# Altium PCB vga.PcbDoc
Units mm, origin at the board's own origin, x right, y up, seen from the top; angles counter-clockwise.
Board outline 35.87 x 32.67 mm, 2 copper layers (Top Layer, Bottom Layer); 2 components, 17 nets, 37 pads, 2 vias.
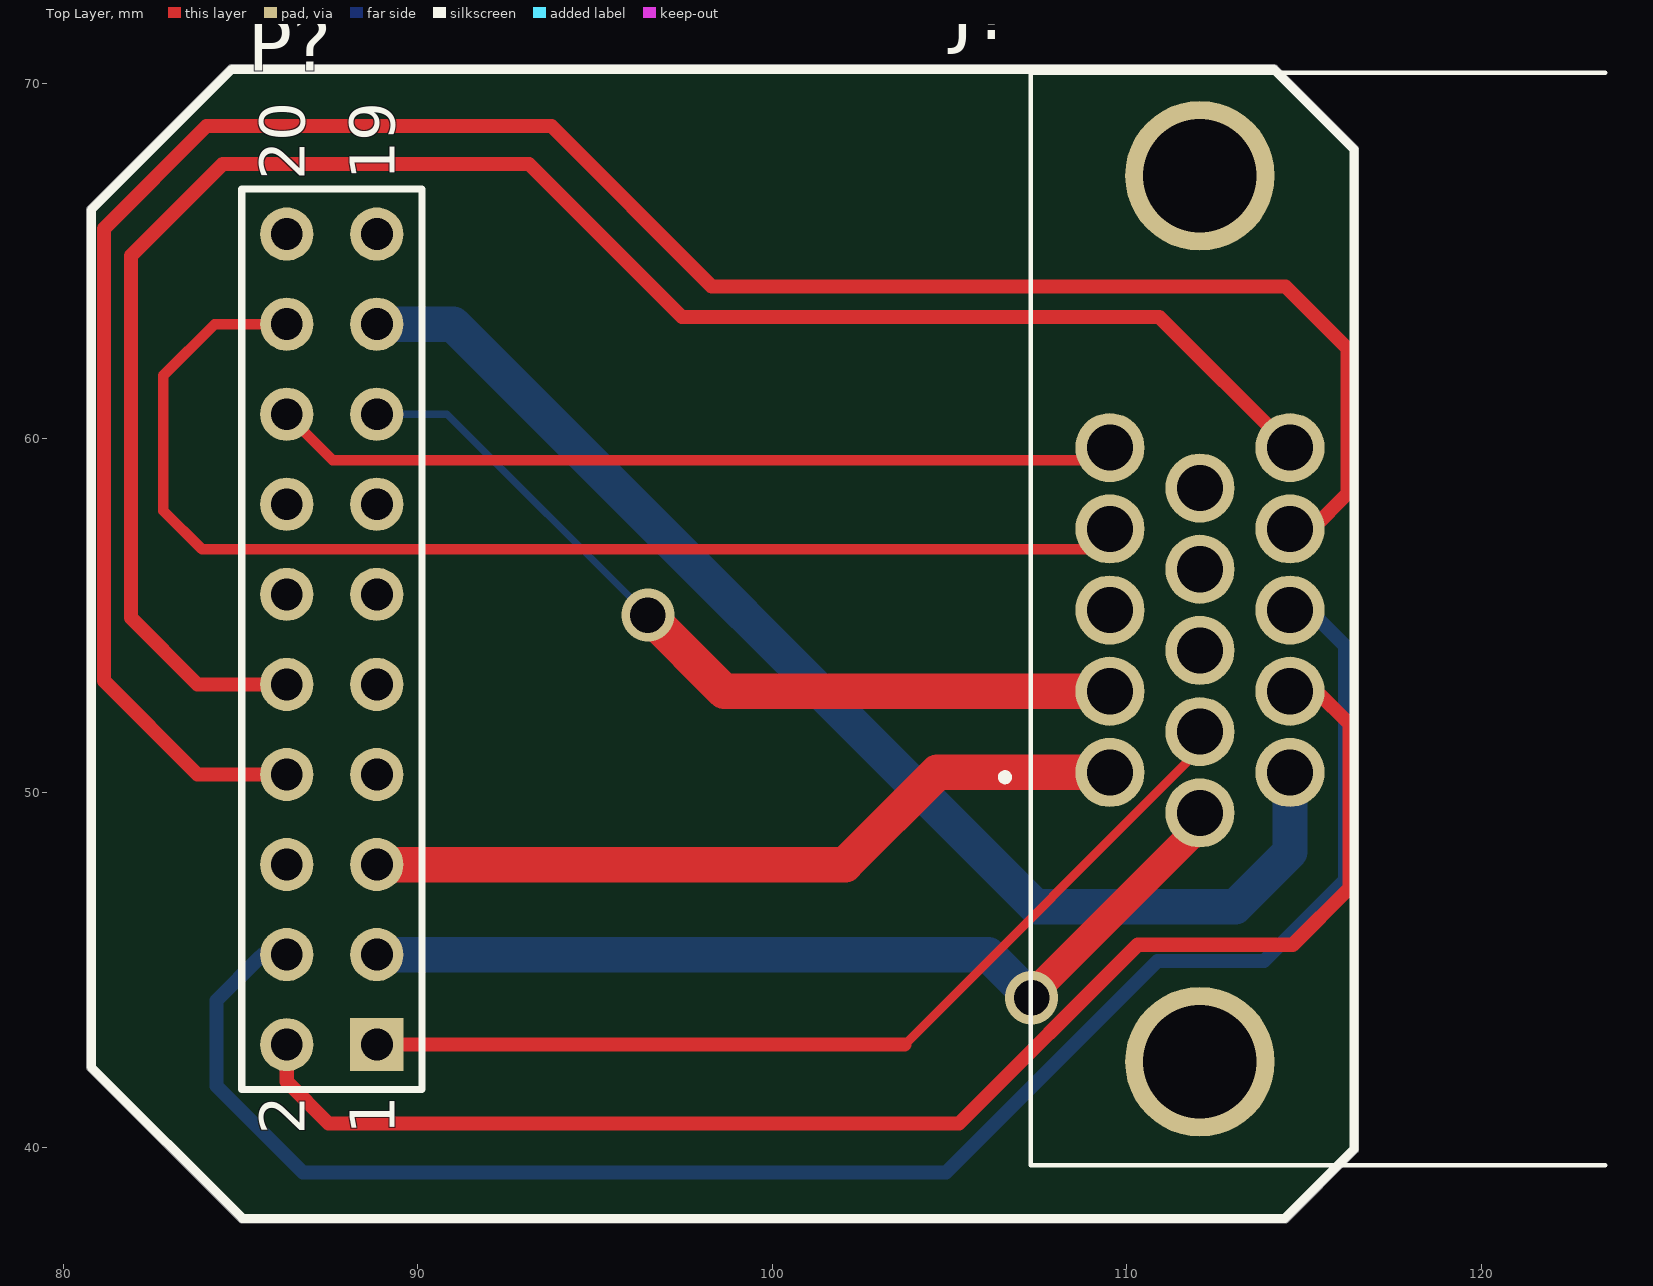
[diagram p0: Top Layer view]
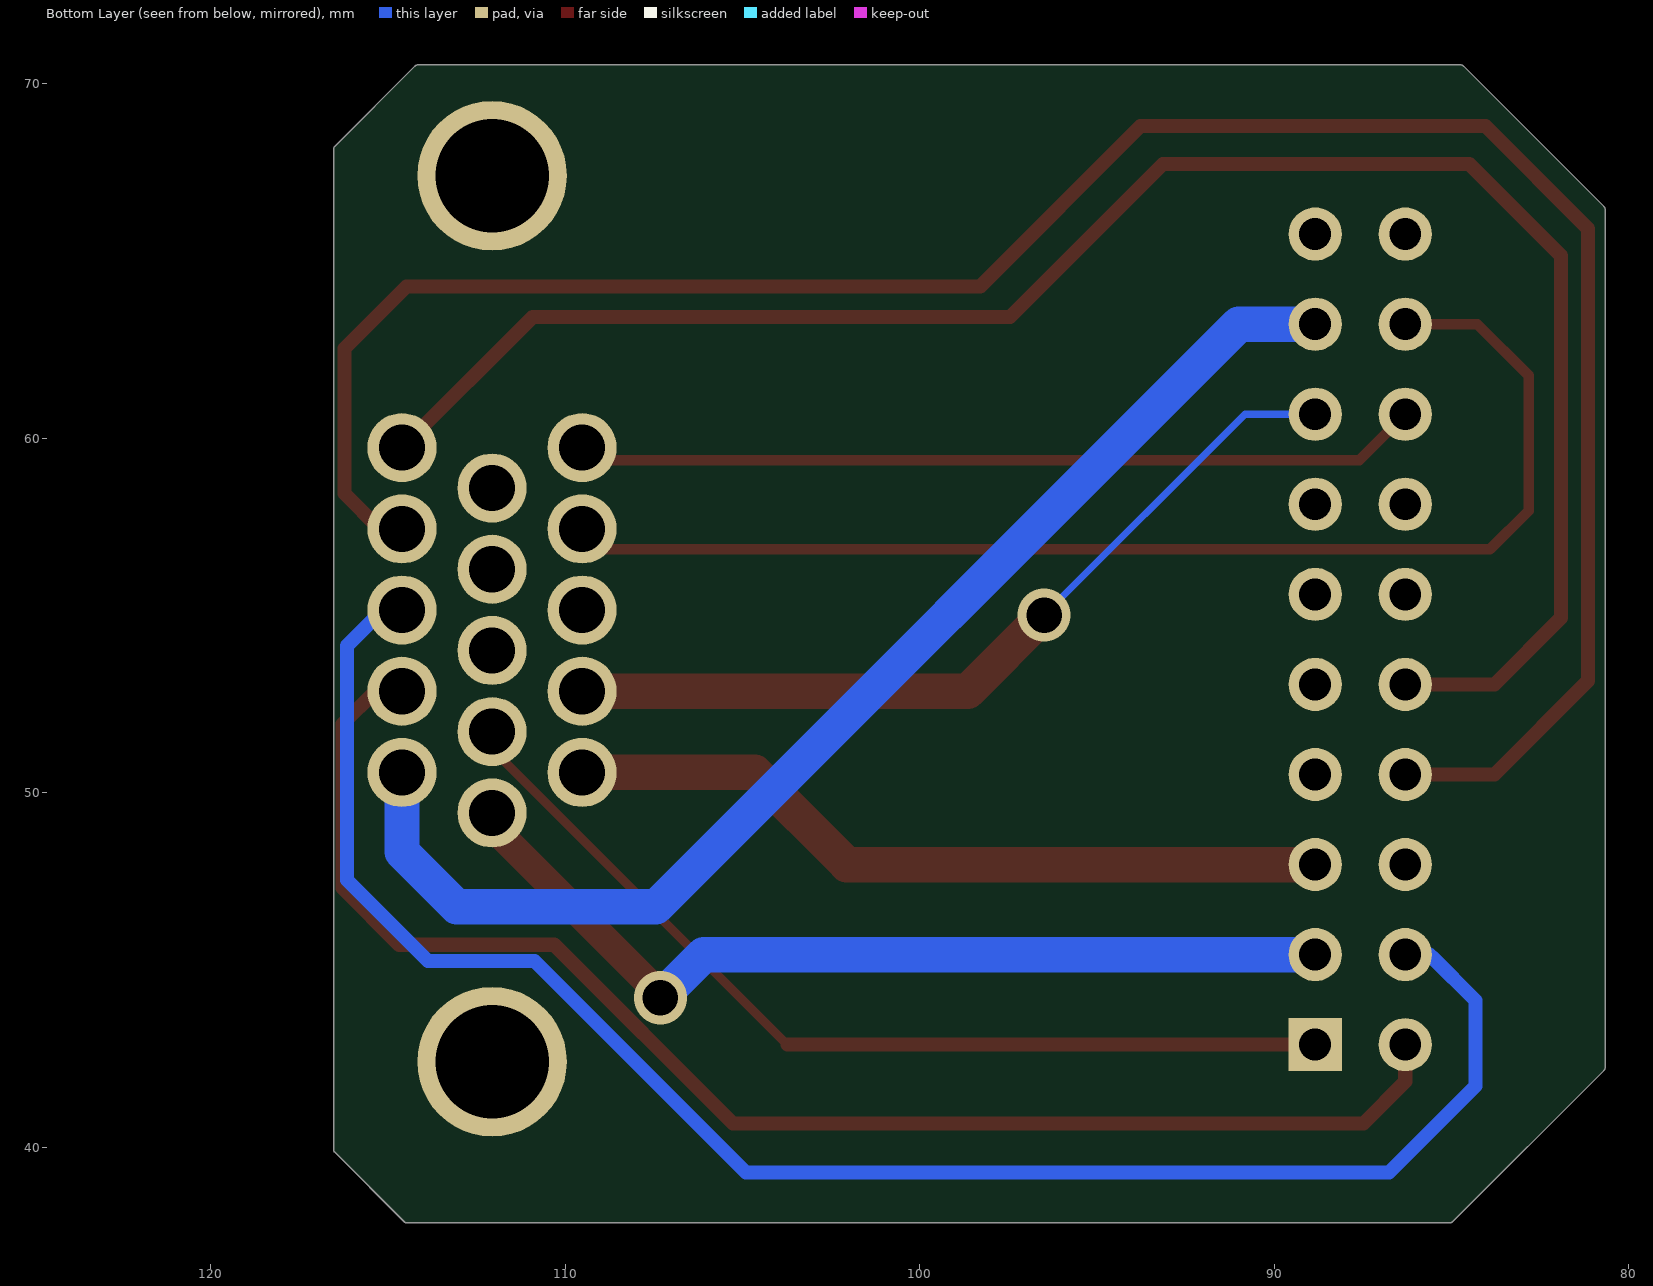
[diagram p1: Bottom Layer view, seen from below]

## Layer stack, top to bottom
Top Solder: solder mask 0.0102, Solder Resist, Dk 3.5
Top Layer: signal copper 0.0356
Dielectric 1: dielectric 0.32, FR-4, Dk 4.8
Bottom Layer: signal copper 0.0356
Bottom Solder: solder mask 0.0102, Solder Resist, Dk 3.5

## Board outline
80.708,42.175 cw(c80.797,42.266) 80.67,42.266 80.67,66.446 cw(c80.797,66.446) 80.708,66.537 80.707,66.536 84.67,70.499 84.669,70.498 cw(c84.76,70.409) 84.76,70.536 114.148,70.536 cw(c114.148,70.409) 114.238,70.498 114.238,70.499 116.498,68.238 116.498,68.239 cw(c116.408,68.148) 116.536,68.148 116.536,39.954 cw(c116.408,39.954) 116.498,39.864 114.542,37.908 114.543,37.909 cw(c114.452,37.998) 114.452,37.871 85.065,37.871 cw(c85.065,37.998) 84.974,37.909 84.975,37.908

## Design rules (kind name [scope] priority, off if disabled: settings)
Clearance [All] p1: gap=0.1 ignorepadtopadclearanceinfootprint=FALSE
PolygonConnect [All] p1: connectstyle=Relief reliefconductorwidth=0.254 reliefentries=4 polygonreliefangle="90 Angle" airgapwidth=0.254
RoutingVias [All] p1: holewidth=0.711 width=1.27 viastyle="Through Hole" minholewidth=0.711 minwidth=1.27 maxholewidth=0.711 maxwidth=1.27
SolderMaskExpansion [All] p1: expansion=0.102
Width [All] p1: maxlimit=1 minlimit=0.2 preferedwidth=0.4
30 further rules are at their usual default settings.

## Components (designator, comment, footprint, x,y, rotation, side; value= is the part's Value field where it differs from the comment)
J? "10090926-P154XLF" AMPHENOL_10090926-P154XLF 112.065,54.908 r90 top
P? "Header 10X2" HDR2X10 88.849,42.901 r90 top

## Footprints (in the part's own frame and the unit in brackets; to place one, negate y for a bottom-side part, rotate by r counter-clockwise, add the part's x,y. Pads: shape width x height; smd on the part's side, far side on the other; paste and mask are expansions set on the pad)
AMPHENOL_10090926-P154XLF [mm]
  round 1.95 hole 1.3: 1(-4.33,2.54) 2(-2.04,2.54) 3(0.25,2.54) 4(2.54,2.54) 5(4.83,2.54) 6(-5.47,0) 7(-3.18,0) 8(-0.89,0) 9(1.4,0) 10(3.69,0) 11(-4.33,-2.54) 12(-2.04,-2.54) 13(0.25,-2.54) 14(2.54,-2.54) 15(4.83,-2.54)
  round 4.216 hole 3.2: S1(-12.49,0) S2(12.5,0)
  silkscreen extent -15.41,-11.43 15.41,5.6, body extent -15.41,-17.33 15.41,4.77, height 12.8
HDR2X10 [mm] "Connector; Header; 10x2 Position"
  rect 1.5x1.5 hole 0.9: 1(0,0)
  round 1.5 hole 0.9: 2(0,2.54) 3(2.54,0) 4(2.54,2.54) 5(5.08,0) 6(5.08,2.54) 7(7.62,0) 8(7.62,2.54) 9(10.16,0) 10(10.16,2.54) 11(12.7,0) 12(12.7,2.54) 13(15.24,0) 14(15.24,2.54) 15(17.78,0) 16(17.78,2.54) 17(20.32,0) 18(20.32,2.54) 19(22.86,0) 20(22.86,2.54)
  silkscreen extent -1.27,-1.27 24.13,3.81

## Part data
J?: "Conn High Density D-Sub PIN 15 POS 2.29mm Solder RA Thru-Hole 15 Terminal 1 Port", Package=None, Availability="In Stock", Check_prices=https://www.snapeda.com/parts/10090926-P154XLF/Amphenol/view-part/?ref=eda, MF=Amphenol, MP=10090926-P154XLF, Price=None, Purchase-URL=https://pricing.snapeda.com/search?q=10090926-P154XLF&ref=eda, SnapEDA_Link=https://www.snapeda.com/parts/10090926-P154XLF/Amphenol/view-part/?ref=snap
P?: "Header, 10-Pin, Dual row", LatestRevisionDate=17-Jul-2002, LatestRevisionNote="Re-released for DXP Platform.", Publisher="Altium Limited"

## Via types
v1: diameter 1.5, hole 1, Top Layer to Bottom Layer, 2 vias

## Nets (pads, with @x,y where several pads share a name; then routed paths per layer and width w, separated by ;. In a path a pad name is that pad's centre, name@x,y a point inside that pad or via, vN(x,y) a via of type N, cw(c..) or ccw(c..) an arc to the next point about the centre after c; other vN are vias at no path point)
abort: J?.7 P?.1 | length 27.2
  Top Layer w0.2: J?.7@112.065,51.232 J?.7
  Top Layer w0.25: 103.734,42.901 J?.7@112.065,51.232
  Top Layer w0.4: P?.1 103.734,42.901
d25: P?.13
dir_x: J?.14 P?.8 | length 64
  Top Layer w0.4: P?.8 83.795,50.521 81.153,53.162 81.153,65.913 84.049,68.809 93.777,68.809 98.298,64.287 114.478,64.287 116.23,62.535 116.23,58.445 115.233,57.448 J?.14
dir_y: J?.15 P?.10 | length 52.5
  Top Layer w0.4: P?.10 83.795,53.061 81.915,54.94 81.915,65.151 84.506,67.742 93.142,67.742 97.46,63.424 110.919,63.424 J?.15
dir_z: P?.12
enable: P?.14
end_x: J?.5 P?.16 | length 23.9
  Top Layer w0.2: J?.5@109.172,59.385 J?.5
  Top Layer w0.3: P?.16 87.605,59.385 J?.5@109.172,59.385
end_y: J?.4 P?.18 | length 35.3
  Top Layer w0.2: J?.4@108.947,56.871 J?.4
  Top Layer w0.3: P?.18 84.277,63.221 82.829,61.773 82.829,57.963 83.922,56.871 J?.4@108.947,56.871
end_z: P?.20
GND: J?.2 P?.15 | length 23.9
  Top Layer w1: v1(96.495,55.016) 98.643,52.868 J?.2
  Bottom Layer w0.2: P?.15 90.83,60.681 v1(96.495,55.016)
hold: J?.6 P?.3 | length 25.7
  Top Layer w0.8: v1@107.475,44.468 J?.6@112.243,49.235
  Bottom Layer w1: P?.3 106.096,45.441 v1(107.315,44.221)
resume: J?.1 P?.5 | length 21.8
  Top Layer w1: P?.5 102.057,47.981 104.655,50.578 J?.1
step_x: J?.12 P?.2 | length 40.9
  Top Layer w0.4: P?.2 86.309,41.859 87.49,40.678 105.27,40.678 110.312,45.72 114.681,45.72 116.281,47.32 116.281,51.943 115.356,52.868 J?.12
step_y: J?.13 P?.4 | length 49.8
  Bottom Layer w0.2: 85.547,45.364 P?.4@85.623,45.441
  Bottom Layer w0.4: 85.547,45.364 84.328,44.145 84.328,41.732 86.766,39.294 104.902,39.294 110.871,45.263 113.868,45.263 116.154,47.549 116.154,54.153 115.149,55.158 J?.13 ; P?.4@85.623,45.441 P?.4
step_z: P?.6
VCC: J?.11 P?.17 | length 35.4
  Bottom Layer w0.2: 90.856,63.221 91.008,63.221
  Bottom Layer w1: P?.17 90.856,63.221 ; 91.008,63.221 107.442,46.787 113.055,46.787 114.605,48.336 J?.11
vin: P?.19
pads on no net: J?.3 J?.8 J?.9 J?.10 J?.S1 J?.S2 P?.7 P?.9 P?.11

## Silkscreen, mask and mechanical layers (free items; w line width, h text height)
Top Overlay:
  lines w0.254: 80.797,42.266 80.797,66.446 84.76,70.409 114.148,70.409 116.408,68.148 116.408,39.954 114.452,37.998 85.065,37.998 80.797,42.266

## Text inside footprints (layer, text, board x,y; h text height)
J?: Mechanical 13 "PCB EDGE" at 123.177,71.101 h1.27 r90
P?: Top Overlay "20" at 86.817,67.285 h1.27 r90; Top Overlay "19" at 89.357,67.285 h1.27 r90; Top Overlay "1" at 89.357,40.361 h1.27 r90; Top Overlay "2" at 86.817,40.361 h1.27 r90